# Allegro board asd.brd
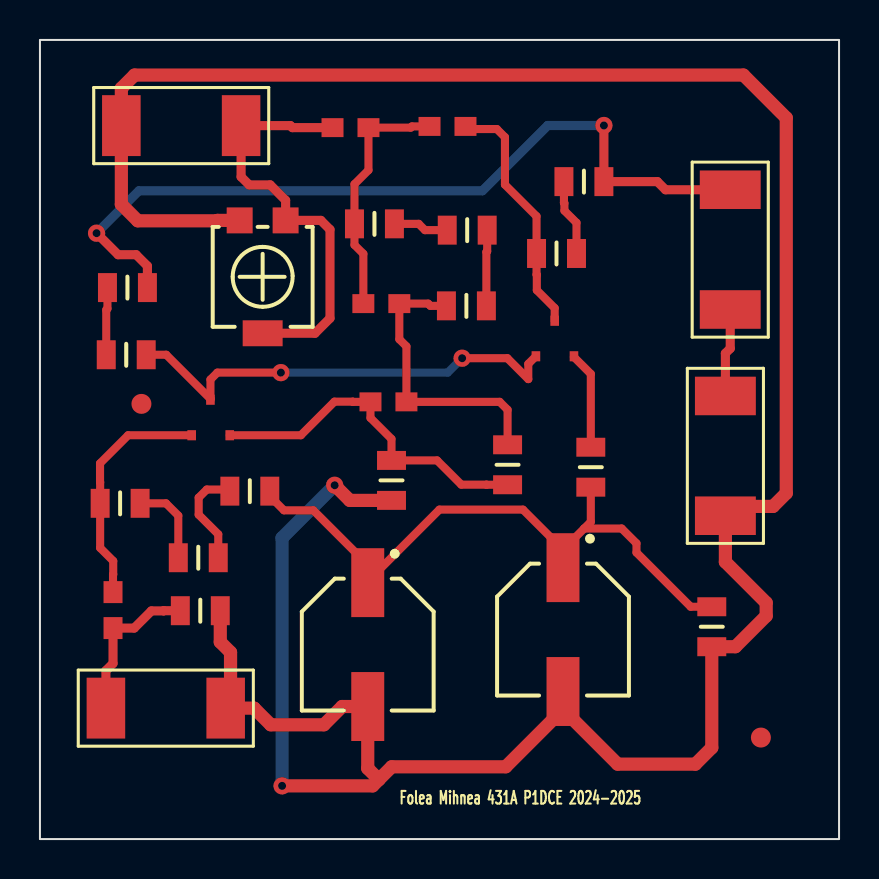
[diagram p0: board, top side]
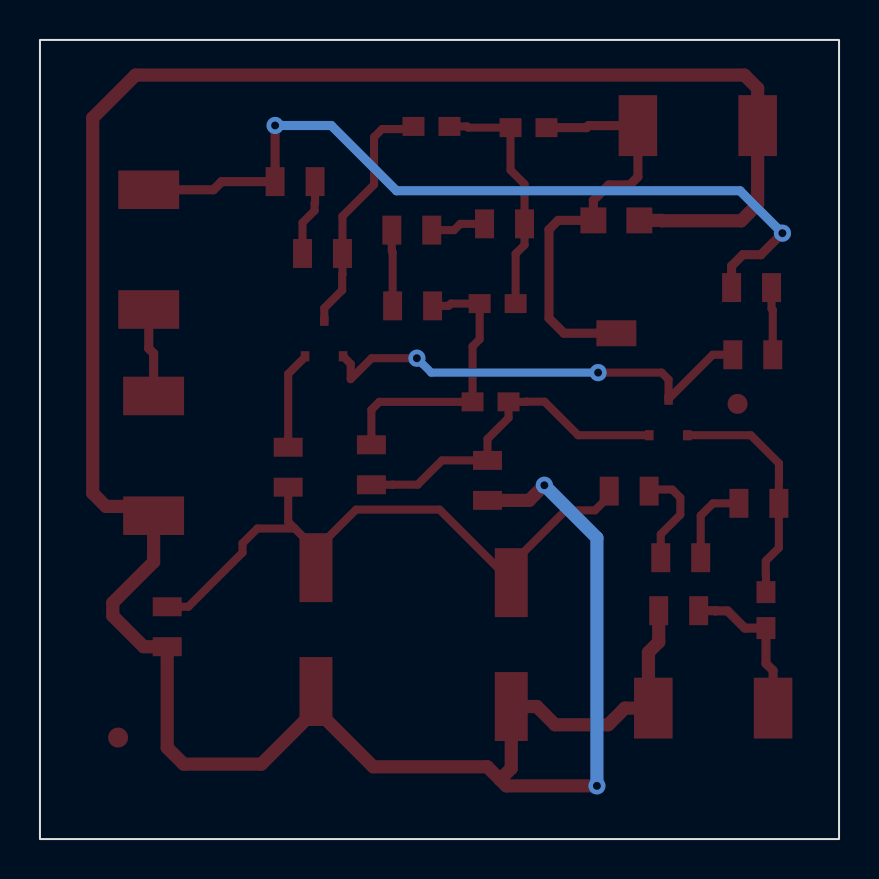
[diagram p1: board, bottom side, seen from below]

Outline 40 x 40 mm; copper layers: TOP, BOTTOM. Coordinates in mm from the lower left corner of the outline.
Outline path: rectangle 0,0 40,40

## Design rules (mm)
nets with their own width: min track width 0.406; nets N01130 N01366 N01466 N01600 N01778 N01822 N01871 N04800 N05286 N06165 N06169 N010480 N039470 N056250
nets with their own width: min track width 0.457; nets OUT V1A+ V2+ V3A+
nets with their own width: min track width 0.66; nets 0

## Placement (name value [footprint] x y rotation side)
C1  10u  [CAPC2008X126N_0805]  3.66 11.46 90 top
C2  4.7u  [CAPC2008X126N_0805]  20.4 35.67 180 top
C4  4.7u  [CAPC2008X126N_0805]  15.54 35.61 180 top
C6  10u  [CAPAE660X770N]  26.18 10.49 270 top
C7  10u  [CAPAE660X770N]  16.41 9.73 270 top
C8  1n  [CAPC2008X126N_0805]  17.44 21.88 0 top
C9  1n  [CAPC2008X126N_0805]  17.09 26.8 180 top
J1  CON2  [SMR2512]  34.55 32.5 270 top
J2  CON2  [SMR2512]  34.31 22.18 270 top
J3  CON2  [SMR2512]  3.3 6.55 0 top
J4  CON2  [SMR2512]  10.07 35.71 180 top
NOREF  -  [unnamed]  36.09 5.08 0 top
NOREF#2  -  [unnamed]  5.08 21.78 0 top
P1  5k  [TS53YL]  10 30.97 90 top
Q1  BC846B  [SOT23]  8.53 21.1 90 top
Q2  BC846B  [SOT23]  25.77 25.05 90 top
R1  47k  [RES2012X50N_0805]  8.03 11.43 180 top
R2  100k  [RES2012X50N_0805]  4.32 24.24 0 top
R3  100k  [RES2012X50N_0805]  4.38 27.6 0 top
R4  1k  [RES2012X50N_0805]  17.6 17.95 90 top
R5  10k  [RES2012X50N_0805]  25.86 29.31 0 top
R6  4.7k  [RES2012X50N_0805]  27.23 32.91 0 top
R7  330k  [RES2012X50N_0805]  4.01 16.8 0 top
R8  15k  [RES2012X50N_0805]  7.92 14.08 0 top
R9  15k  [RES2012X50N_0805]  10.51 17.41 0 top
R10  1k  [RES2012X50N_0805]  33.63 10.63 90 top
R11  68k  [RES2012X50N_0805]  23.41 18.74 270 top
R12  510k  [RES2012X50N_0805]  21.35 26.69 0 top
R13  150k  [RES2012X50N_0805]  21.39 30.48 180 top
R14  150k  [RES2012X50N_0805]  16.74 30.79 0 top
R15  1  [RES2012X50N_0805]  27.57 18.61 90 top

## Library data of the parts
C1 C2 C4 C8 C9 = C
C6 = C_elect_1
C7 = C_elect_0
J1-J4 = CON2
P1 = POT
Q1 = BC846B_0
Q2 = BC846B_1
R1-R15 = R

## Footprints (pads in the part's own frame, mm; a bottom-side part is the same pattern mirrored in y, then rotated)
CAPAE660X770N
  rect 3.45x1.65 smd: 1(-3.1,0) 2(3.1,0)
CAPC2008X126N_0805
  rect 1.1x0.95 smd: 1(-0.9,0) 2(0.9,0)
RES2012X50N_0805
  rect 0.95x1.45 smd: 1(-1,0) 2(1,0)
SMR2512
  rect 1.93x3.048 smd: 1(0,0) 2(5.994,0)
SOT23
  rect 0.508x0.432 smd: 1(-0.889,0.94) 2(-0.889,-0.965) 3(0.889,0)
TS53YL
  rect 1.3x1.3 smd: 1(0,0) 3(0,-2.3)
  rect 1.3x2 smd: 2(-5.65,-1.15)
unnamed
  round 1 smd: (0,0)

## Nets
V1A+: C1.1 J3.1 R1.2
V2+: J1.1 R3.2 R6.2
V3A+: J1.2 J2.1
0: C6.2(-) C7.2(-) J2.2 J3.2 J4.2 P1.1 R1.1 R4.1 R10.1
OUT: C4.2 J4.1 P1.2(T) P1.3
N01130: C1.2 Q1.1 R7.1
N01366: C8.1 Q1.2(E) R4.2 R11.2
N01466: Q1.3 Q2.1 R2.2
N01600: C6.1 C7.1 R9.2 R10.2 R15.1
N01778: C2.1 Q2.3 R5.1
N01822: C8.2 C9.1 R11.1 R12.1
N01871: C2.2 C4.1 C9.2 R14.1
N04800: R2.1 R3.1
N05286: R5.2 R6.1
N06165: R12.2 R13.1
N06169: R13.2 R14.2
N010480: R7.2 R8.1
N039470: Q2.2(E) R15.2
N056250: R8.2 R9.1

## Via types
v1: diameter 0.864, hole 0.4, TOP to BOTTOM, 6 vias

## Routing (per net, layer and track width the routed paths; a pad name or vN(x,y) marks a point on that pad's centre or on a via; arc(x,y) is an arc through that point)
V1A+: length 7.9
  TOP w0.457: J3.1 3.3,8.43 3.66,8.79 C1.1 4.72,10.56 5.58,11.42 6.19,11.42 6.2,11.43 R1.2
V2+: length 41.2
  TOP w0.457: J1.1 31.31,32.5 30.91,32.91 R6.2 v1(28.23,35.72) ; v1(2.83,30.33) 3.91,29.25 4.81,29.25 5.38,28.69 R3.2
  BOTTOM w0.457: v1(28.23,35.72) 25.42,35.72 22.15,32.45 4.96,32.45 v1(2.83,30.33)
V3A+: length 4.4
  TOP w0.457: J2.1 34.31,24.31 34.55,24.56 J1.2
0: length 144.8
  TOP w0.66: 26.18,6.48 28.92,3.75 32.81,3.75 33.63,4.57 R10.1 34.81,9.63 36.35,11.17 36.35,11.83 34.31,13.87 J2.2 34.78,16.65 36.7,16.65 37.36,17.31 37.36,36.1 35.21,38.24 4.73,38.24 4.07,37.58 J4.2 4.07,31.77 4.9,30.95 8.87,30.95 8.89,30.97 P1.1 ; 26.18,6.48 23.31,3.62 17.61,3.62 16.97,2.98 ; 26.18,6.48 C6.2 ; 16.97,2.98 16.65,2.66 v1(12.12,2.66) ; 16.97,2.98 16.41,3.54 C7.2 15.13,6.63 14.21,5.72 11.55,5.72 10.72,6.55 J3.2 9.54,6.8 9.54,9.35 9.03,9.86 R1.1 ; v1(14.75,17.71) 15.51,16.95 R4.1
  BOTTOM w0.66: v1(14.75,17.71) 12.12,15.08 v1(12.12,2.66)
OUT: length 21.4
  TOP w0.457: C4.2 12.64,35.61 12.54,35.71 J4.1 10.07,33.15 10.47,32.75 11.52,32.75 12.3,31.97 P1.3 14.06,30.97 14.52,30.51 14.52,26.07 13.77,25.32 P1.2
N01130: length 11.9
  TOP w0.406: Q1.1 4.41,20.21 3.01,18.81 3.01,17.87 3.01,17.86 R7.1 3.01,14.57 3.67,13.92 3.67,13.25 3.66,13.24 C1.2
N01366: length 17.4
  TOP w0.406: Q1.2 13.06,20.21 14.74,21.89 15.65,21.89 15.66,21.88 C8.1 16.54,21.08 17.6,20.03 R4.2 19.88,18.95 21.09,17.74 22.35,17.74 22.35,17.74 R11.2
N01466: length 23.2
  TOP w0.406: R2.2 6.32,24.24 8.53,22.03 ; 8.53,22.03 8.53,23 8.88,23.35 v1(12.06,23.35) ; 8.53,22.03 Q1.3 ; v1(21.13,24.07) 23.4,24.07 24.44,23.02 24.44,23.78 Q2.1
  BOTTOM w0.406: v1(12.06,23.35) 20.41,23.35 v1(21.13,24.07)
N01600: length 32.4
  TOP w0.406: 16.41,12.9 16.41,13.73 13.69,16.46 12.21,16.46 11.51,17.16 R9.2 ; 16.41,12.9 C7.1 ; 16.41,12.9 19.99,16.49 24.18,16.49 26.18,14.49 ; R10.2 32.57,11.63 29.86,14.34 29.86,14.8 29.12,15.54 27.24,15.54 ; 26.18,14.49 C6.1 ; 26.18,14.49 27.24,15.54 ; 27.24,15.54 27.57,15.88 R15.1
N01778: length 12.4
  TOP w0.406: C2.1 21.43,35.54 22.87,35.54 23.28,35.13 23.28,32.76 24.86,31.18 R5.1 24.86,28.26 24.87,28.24 24.87,27.47 25.77,26.58 Q2.3
N01822: length 14.4
  TOP w0.406: R12.1 19.54,26.69 19.43,26.8 C9.1 17.99,25.02 18.34,24.66 C8.2 23.01,21.88 23.41,21.49 R11.1
N01871: length 12.4
  TOP w0.406: C9.2 16.19,29.29 15.74,29.74 R14.1 15.74,32.78 16.44,33.48 C4.1 18.56,35.61 18.62,35.67 C2.2
N04800: length 3.4
  TOP w0.406: R2.1 3.32,26.49 3.38,26.55 R3.1
N05286: length 3.9
  TOP w0.406: R5.2 26.86,30.85 26.25,31.46 26.25,31.83 26.23,31.85 R6.1
N06165: length 3.8
  TOP w0.406: R12.2 22.35,29.38 22.39,29.42 R13.1
N06169: length 2.8
  TOP w0.406: R13.2 19.27,30.48 18.96,30.79 R14.2
N010480: length 4.3
  TOP w0.406: R8.1 6.92,16.19 6.31,16.8 R7.2
N039470: length 4.9
  TOP w0.406: Q2.2 26.73,24.13 27.57,23.28 R15.2
N056250: length 5.2
  TOP w0.406: R9.1 9.42,17.5 8.35,17.5 7.95,17.09 7.95,16.24 8.92,15.26 R8.2

## Text on the board
Ref Des/Silkscreen Top: Folea Mihnea 431A P1DCE 2024-2025
XSECTION_CHART: *  SURFACE | L1 TOP CONDUCTOR | *  DIELECTRIC | L2 BOTTOM CONDUCTOR | DESIGN CROSS SECTION CHART | ___________________________ | TOTAL THICKNESS 10.4 MIL | 1-2
DISPLAY_TOP: FIGURE | FINISHED_SIZE | 15.75 | DRILL CHART: TOP to BOTTOM | ALL UNITS ARE IN MILS | PLATED | QTY | 6
